# Altium PCB BBB_Board.PcbDoc (part 3 of 3)
Units mil, origin at the board's own origin, x right, y up, seen from the top; angles counter-clockwise.
Board outline 11000 x 5000 mil, 2 copper layers (Top Layer, Bottom Layer); 90 components, 379 nets, 1020 pads, 470 vias.
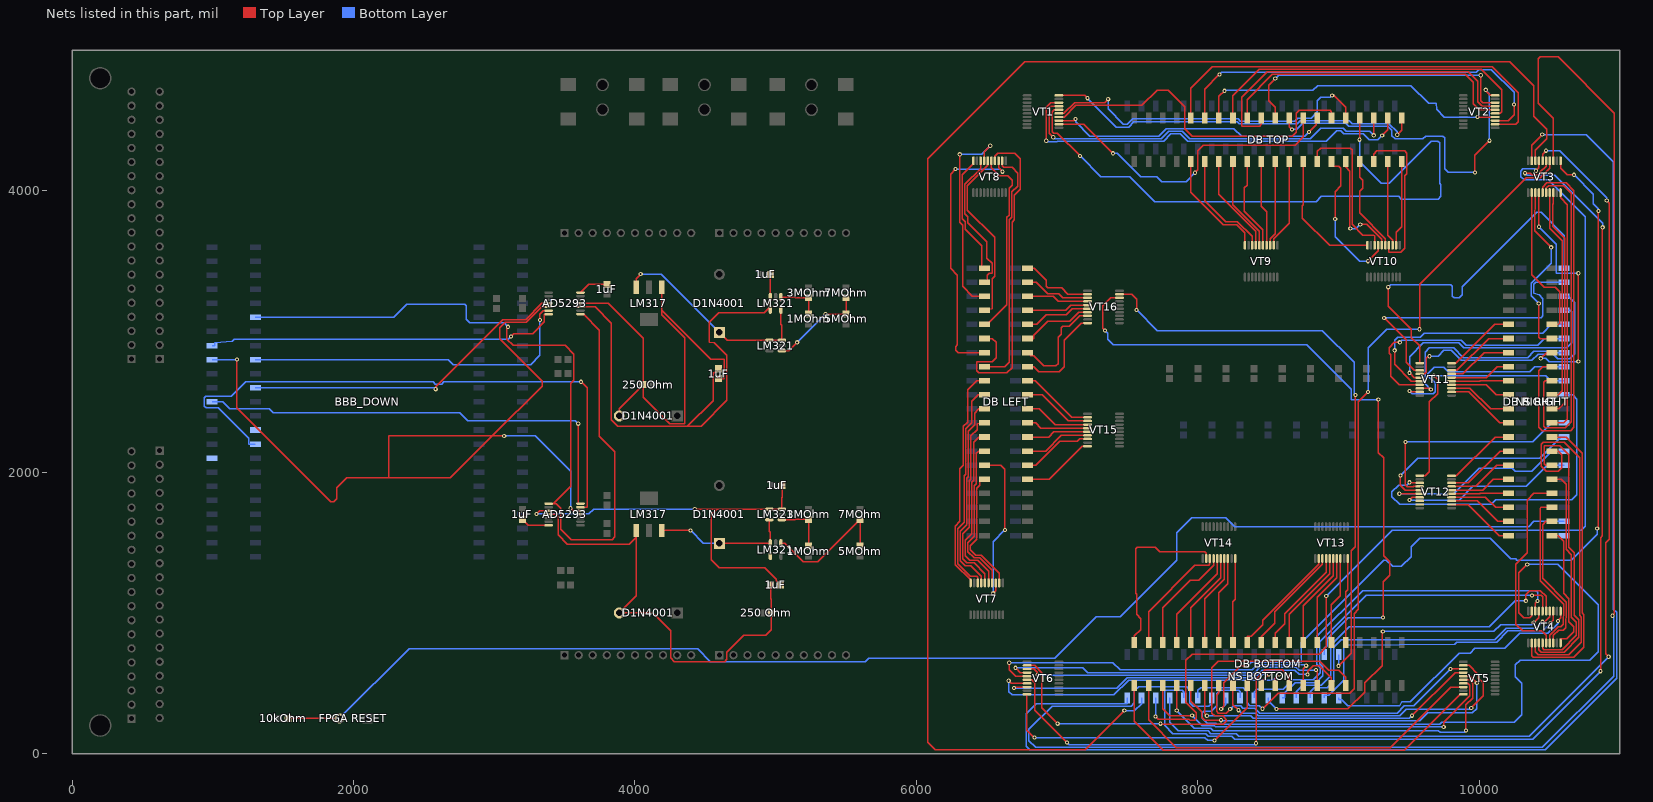
[diagram p3: the nets of this part, all layers, seen from the top]

## Via types
v1: diameter 30, hole 15, Top Layer to Bottom Layer, 470 vias

## Nets (pads, with @x,y where several pads share a name; then routed paths per layer and width w, separated by ;. In a path a pad name is that pad's centre, name@x,y a point inside that pad or via, vN(x,y) a via of type N, cw(c..) or ccw(c..) an arc to the next point about the centre after c; other vN are vias at no path point) (continued)
IVL_B94: "NS BOTTOM.15" VT16.8 | length 4720.5
  Top Layer w10: v1(7340,3006) 7323,3023 7323,3181.98 7380,3238.98 VT16.8@7443.19,3238.98 ; v1(9283,2516) 9283,2139.47 9321,2101.47 9321,1406.71 9363,1364.71 9363,1269 9317,1223 v1(9317,967)
  Bottom Layer w10: v1(7340,3006) 7360,2986 7360,2946 7400.42,2905.58 8774.42,2905.58 9090,2590 9090,2518 9092,2516 v1(9283,2516) ; 8900,703.54 8900,749 8919,768 8919,816 9070,967 v1(9317,967)
IVL_B95: "NS BOTTOM.16" VT16.9 | length 4201.9
  Top Layer w10: VT16.9@7443.19,3264.57 7530.43,3264.57 7565,3230 v1(7565,3153) ; v1(9000,624) 9091,715 9091,1442 9120,1471 v1(9120,2548)
  Bottom Layer w10: v1(7565,3153) 7712,3006 8883.73,3006 9110,2779.73 9110,2558 v1(9120,2548) ; v1(9000,624) 9000,703.54
IVL_B96: "NS BOTTOM.25" VT4.1 | length 1929.9
  Top Layer w10: v1(10560,942) 10560,947.34 10577.66,965 VT4.1@10577.66,1013.19
  Bottom Layer w10: 9000,396.46 9000,384 9023.4,384 9065.31,342.08 9434.69,342.08 9450,368 9510,368 9856.22,714.22 9934.72,714.22 9969.5,749 10180.17,749 10286.17,855 10488.43,855 10560,926.57 v1(10560,942)
IVL_B97: "NS BOTTOM.26" VT4.3 | length 2073.2
  Top Layer w10: v1(10506.48,928) 10526.48,948 VT4.3@10526.48,1013.19
  Bottom Layer w10: 8900,396.46 8900,416 8930.17,416 9036,521.83 9036,768.69 9824.21,776 9841.21,793 10122.77,793 10202.77,873 10451.48,873 v1(10506.48,928)
IVL_B98: "NS BOTTOM.27" VT4.4 | length 2149.5
  Top Layer w10: v1(10450.49,936.55) 10465.55,936.55 10500.89,971.89 VT4.4@10500.89,1013.19
  Bottom Layer w10: 8800,396.46 8800,441 8827,468 8919.17,468 8965,513.83 8965,757.69 9018.31,811 10111.19,811 10191.19,891 10404.94,891 v1(10450.49,936.55)
IVL_B99: "NS BOTTOM.28" VT4.5 | length 2389.4
  Top Layer w10: v1(10331,1086) 10331,1129 10360,1158 10434,1158 10475.3,1116.7 VT4.5@10475.3,1013.19
  Bottom Layer w10: 8700,396.46 8700,440 8746,486 8879,486 8946,553 8946,770.39 9075.61,900 10070,900 10256,1086 v1(10331,1086)
IVL_B100: "NS BOTTOM.29" VT4.6 | length 2451.1
  Top Layer w10: v1(10375.7,1124) 10439.7,1124 10449.7,1114 VT4.6@10449.7,1013.19
  Bottom Layer w10: 8600,396.46 8619,396.46 8619,432 8692,505 8840,505 8889,554 8889,616.28 8865,640.28 8865,793.5 9195.5,1124 v1(10375.7,1124)
IVL_B101: "NS BOTTOM.30" VT4.7 | length 2463
  Top Layer w10: v1(8559,318) 9066.42,318 9186,437.58 9186,502 9310,626 9310,868 v1(9315,868) ; v1(10388,931) 10424.11,967.11 VT4.7@10424.11,1013.19
  Bottom Layer w10: 8500,396.46 8500,377 v1(8559,318) ; v1(9315,868) 10103.3,868 10151.3,916 10374,916 10388,930 v1(10388,931)
IVL_B102: "NS BOTTOM.31" VT4.8 | length 2685.7
  Top Layer w10: VT4.8@10398.52,1013.19 10398.52,1068.52 v1(10414,1084)
  Bottom Layer w10: 8400,396.46 8400,438 8420,458 8608,458 8674,524 8819.83,524 8869.83,574 8869.83,610 8846,633.83 8846,834 9171,1159 10402.62,1159 10414,1147.62 v1(10414,1084)
IVL_B103: "NS BOTTOM.32" VT4.9 | length 5261.4
  Top Layer w10: v1(10341,1345) 10280,1284 10280,1001 10315,966 10360,966 10372.93,978.93 VT4.9@10372.93,1013.19
  Bottom Layer w10: 8300,396.46 8300,441 8290,451 8160,451 8136,427 8136,339 8097,300 8043,300 8032,289 8032,251 8066,217 8126,217 8135,208 9719,208 9733,222 10249,222 10303,276 10303,499 10257,545 10257,630.88 10291.12,665 10784,665 10844,725 10844,1058 10557,1345 v1(10341,1345)
IVL_B104: "NS BOTTOM.33" VT3.1 | length 6463
  Top Layer w10: v1(8166,318) 8185,337 8185,504 8306,625 v1(8356,625) ; VT3.1@10577.66,4213.19 10577.66,4160 10624.66,4113 v1(10674,4113) ; v1(10838,1599) 10847,1608 v1(10847,3857)
  Bottom Layer w10: v1(8166,318) 8200,352 8200,396.46 ; v1(8356,625) 8380.17,649.17 8735,649.17 8735,787 9323,1375 9340,1375 9385,1330 9447,1330 9516,1399 9516,1469 9578,1531 10077,1531 10224,1384 10258,1384 10267,1375 10654,1375 10838,1559 v1(10838,1599) ; v1(10674,4113) 10811,3976 10811,3909 10847,3873 v1(10847,3857)
IVL_B105: "NS BOTTOM.34" VT3.3 | length 11595.3
  Top Layer w10: VT3.3@10526.48,4213.19 10526.48,4516.52 10420,4623 10420,4939 10433,4952 10561,4952 10961,4552 10961,994 v1(10947,980)
  Bottom Layer w10: 8100,396.46 8100,356 8079,335 7969,335 7944,360 7944,452 7920,476 7580,476 7550,446 7550,360 7526,336 6964,336 6800,172 6800,91 6847,44 10448,44 10955,551 10955,972 v1(10947,980)
IVL_B106: "NS BOTTOM.35" VT3.4 | length 5864.2
  Top Layer w10: v1(8460,319) 8570.58,429.58 9079.58,429.58 9110,460 9110,995 9140,1025 9140,2500 v1(9210,2570) ; v1(9576,3016) 9576,3334.23 10335.47,4093.69 10434.81,4093.69 10500.89,4159.77 VT3.4@10500.89,4213.19
  Bottom Layer w10: 8000,396.46 8000,450 8020,470 8322,470 8352,440 8352,360 8369.92,342.08 8436.92,342.08 v1(8460,319) ; v1(9210,2570) 9210,2884 9342,3016 v1(9576,3016)
IVL_B107: "NS BOTTOM.36" VT3.5 | length 7882.8
  Top Layer w10: v1(10326,4125) 10361,4125 10374,4112 10420,4112 10434.11,4126.11 10434.11,4133.78 10475.3,4174.96 VT3.5@10475.3,4213.19 ; v1(10862,586) 10862,1534 10875,1547 10875,3738 v1(10877,3740)
  Bottom Layer w10: 7900,396.46 7900,441 7890,451 7765,451 7765,200 7822,143 8056,143 8074,125 8242,125 8263,104 10380,104 v1(10862,586) ; v1(10326,4125) 10341,4110 10537,4110 10877,3770 v1(10877,3740)
IVL_B108: "NS BOTTOM.37" VT3.6 | length 7510
  Top Layer w10: VT3.6@10449.7,4213.19 10449.7,4260.7 v1(10474,4285) ; v1(10906,3931) 10925,3912 10925,3692 10923,3690 10923,1523 10899,1499 10899,709.75 v1(10919.88,688.88)
  Bottom Layer w10: 7800,396.46 7800,223 7862,161 8074,161 8092,143 8272,143 8291,124 10355,124 v1(10919.88,688.88) ; v1(10474,4285) 10572,4285 10906,3951 v1(10906,3931)
IVL_B109: "NS BOTTOM.38" VT3.7 | length 7340.5
  Top Layer w10: v1(7700,264) 7720,244 7938,244 7943,239 7977,239 7990,252 7990,289 7914,365 7914,662 7960,708 8862,708 8913,759 v1(8913,1120) ; v1(10404,4142) 10424.11,4162.11 VT3.7@10424.11,4213.19
  Bottom Layer w10: v1(7700,264) 7700,396.46 ; v1(8913,1120) 9382,1589 10726,1589 10753,1616 10753,3816 10492,4077 10319,4077 10295,4101 10295,4140 10310,4155 10391,4155 v1(10404,4142)
IVL_B110: "NS BOTTOM.39" VT3.8 | length 11130.7
  Top Layer w10: v1(7478,306) 7200,28 6135,28 6082,81 6082,4229 6771,4918 10216,4918 10388,4746 10388,4528 10479,4437 10479,4370 10398.52,4289.52 VT3.8@10398.52,4213.19
  Bottom Layer w10: v1(7478,306) 7550,306 7600,356 7600,396.46
IVL_B111: "NS BOTTOM.40" VT3.9 | length 9924.6
  Top Layer w10: VT3.9@10372.93,4213.19 10372.93,4323.93 v1(10448,4399)
  Bottom Layer w10: 7500,396.46 7500,355 6851,355 6781,285 6781,50.97 6805.97,26 10469,26 10977,534 10977,1004.43 10954,1027.43 10954,4206 10761,4399 v1(10448,4399)
IVL_B112: "NS RIGHT.1" VT11.1 | length 2553.5
  Top Layer w10: v1(9353,3315) 9353,3180 9518,3015 9518,2955.94 9577,2896.94 9577,2775.16 VT11.1@9576.81,2775.16
  Bottom Layer w10: v1(9353,3315) 9354,3315 9370,3331 9798,3331 9809,3320 9809,3252 9821,3240 9859,3240 9879,3260 9879,3317 10408.93,3846.93 10439.07,3846.93 10604,3682 10604,3450 10603.54,3450
IVL_B113: "NS RIGHT.2" VT11.3 | length 2123
  Top Layer w10: v1(9324.5,3096.5) 9481,2940 9481,2782.54 9539.57,2723.98 VT11.3@9576.81,2723.98
  Bottom Layer w10: v1(9324.5,3096.5) 10439.5,3096.5 10453,3110 10453,3234 10427,3260 10387,3270 10387,3335.5 10401.5,3350 10603.54,3350
IVL_B114: "NS RIGHT.3" VT11.4 | length 1759.4
  Top Layer w10: VT11.4@9576.81,2698.39 9612,2698.39 9623.31,2709.7 9623.31,2810 9637.31,2824 v1(9646,2824)
  Bottom Layer w10: v1(9646,2824) 9708,2824 9749,2865 9800,2865 9871,2794 10374.31,2794 10420,2839.69 10526.36,2839.69 10559.04,2807 10643,2807 10677,2841 10677,3204 10631,3250 10603.54,3250
IVL_B115: "NS RIGHT.4" VT11.5 | length 1702.7
  Top Layer w10: v1(9505,2706) 9538.2,2672.8 VT11.5@9576.81,2672.8
  Bottom Layer w10: v1(9505,2706) 9505,2821.45 9602.55,2919 9854.45,2919 9888.76,2884.69 10622.69,2884.69 10659,2921 10659,3139 10648,3150 10603.54,3150
IVL_B116: "NS RIGHT.5" VT11.6 | length 1649.4
  Top Layer w10: v1(9398.82,2866.18) 9398.82,2766.18 9517.8,2647.2 VT11.6@9576.81,2647.2
  Bottom Layer w10: v1(9398.82,2866.18) 9398.82,2936.63 9420,2957.82 9579.47,2957.82 9610.65,2989 10450.28,2989 10511.28,3050 10603.54,3050
IVL_B117: "NS RIGHT.6" VT11.7 | length 1739
  Top Layer w10: v1(9435.63,2923) 9397,2923 9360,2886 9360,2846 9371,2835 9371,2681 9430.39,2621.61 VT11.7@9576.81,2621.61
  Bottom Layer w10: v1(9435.63,2923) 9450.63,2938 9871.45,2938 9906.45,2903 10415,2903 10462,2950 10603.54,2950
IVL_B118: "NS RIGHT.7" VT11.8 | length 1417
  Top Layer w10: VT11.8@9576.81,2596.02 9646.98,2596.02 v1(9656,2587)
  Bottom Layer w10: v1(9656,2587) 9615,2628 9615,2853.02 9644.98,2883 9818,2883 9887,2814 10344.57,2814 10388.57,2858 10536.36,2858 10544.36,2850 10603.54,2850
IVL_B119: "NS RIGHT.8" VT11.9 | length 1438.9
  Top Layer w10: v1(9504,2577) 9510.57,2570.43 VT11.9@9576.81,2570.43
  Bottom Layer w10: v1(9504,2577) 9525,2556 9672,2556 9686,2570 9686,2634 9634,2686 9634,2699 9680,2745 9748,2745 9779,2714 10360,2714 10396,2750 10603.54,2750
IVL_B120: "NS RIGHT.9" VT12.1 | length 1743.1
  Top Layer w10: VT12.1@9576.81,1975.16 9618,1975.16 9646.17,2003.32 9646.17,2499.17 9704,2557 9704,2659 v1(9676,2687)
  Bottom Layer w10: v1(9676,2687) 10474,2687 10511,2650 10603.54,2650
IVL_B121: "NS RIGHT.10" VT12.3 | length 2410.1
  Top Layer w10: v1(9505,1928) 9509.02,1923.98 VT12.3@9576.81,1923.98
  Bottom Layer w10: v1(9505,1928) 9485.5,1908.5 9427.5,1908.5 9380,1861 9380,1825 9434,1771 10085,1771 10116.69,1802.69 10656.69,1802.69 10694,1840 10694,2520 10664,2550 10603.54,2550
IVL_B122: "NS RIGHT.12" VT12.4 | length 1598.1
  Top Layer w10: v1(9475,2215) 9475,1910 9489,1896 9532.61,1896 9535,1898.39 VT12.4@9576.81,1898.39
  Bottom Layer w10: v1(9475,2215) 10380,2215 10515,2350 10603.54,2350
IVL_B123: "NS RIGHT.13" VT12.5 | length 1497.4
  Top Layer w10: v1(9440,1976) 9440,1906.36 9473.56,1872.8 VT12.5@9576.81,1872.8
  Bottom Layer w10: v1(9440,1976) 9564,2100 10430,2100 10580,2250 10603.54,2250
IVL_B124: "NS RIGHT.14" VT12.6 | length 1459.1
  Top Layer w10: v1(9432,1847) 9432.2,1847.2 VT12.6@9576.81,1847.2
  Bottom Layer w10: v1(9432,1847) 9818,1847 9999,2028 10234,2028 10254.65,2007.35 10374.35,2007.35 10517,2150 10603.54,2150
IVL_B125: "NS RIGHT.15" VT12.7 | length 1283.2
  Top Layer w10: v1(9504,1802) 9523.61,1821.61 VT12.7@9576.81,1821.61
  Bottom Layer w10: v1(9504,1802) 9857,1802 9955,1900 10334,1900 10484,2050 10603.54,2050
IVL_B126: VT12.8
IVL_B127: VT12.9
Net1_U_Power_Control1_2: 1uF.2@4965,1200 "250 Ohm.1"@4968,1000 AD5293.4@3386.81,1700 D1N4001.1@3889.09,1000 LM317.1@4009.45,1585.83 | length 3219.4
  Top Layer w10: AD5293.4@3386.81,1700 3437,1700 3455,1682 3455,1554 3520,1489 3960,1489 4009.45,1538.45 ; LM317.1@4009.45,1585.83 4009.45,1538.45 ; 1uF.2@4965,1200 4965,1101 4968,1098 4968,1000 4968,880 4928,840 4775,840 4654,719 4654,669 4639,654 4281,654 4254,681 4254,872 4126,1000 D1N4001.1@3889.09,1000 4009.45,1120.35 4009.45,1538.45
Net1_U_Power_Control2_2: 1uF.2@4595,2665 "250 Ohm.1"@4059,2622 AD5293.4@3613.19,3200 D1N4001.1@3889.09,2400 LM317.1@4190.55,3314.17 | length 3435.1
  Top Layer w10: AD5293.4@3613.19,3200 3812,3200 4059,2953 4059,2622 ; D1N4001.1@3889.09,2400 3889.09,2452.09 4059,2622 ; LM317.1@4190.55,3314.17 4190.55,3150.56 ; 1uF.2@4595,2665 4635,2665 4635,2799 4632.88,2801.12 4540,2801.12 4190.55,3150.56 ; 4059,2622 4059,2533.16 4246.53,2345.63 4355.28,2345.63 4355.28,2954.27 4190.55,3119 4190.55,3150.56
Net5_U_Power_Control1_2: 1uF.2@3200,1665 AD5293.7@3386.81,1623.23 | length 204.1
  Top Layer w10: 1uF.2@3200,1665 3241.77,1623.23 AD5293.7@3386.81,1623.23
Net5_U_Power_Control2_2: 1uF.2@3800,3335 AD5293.7@3613.19,3276.77 | length 210.9
  Top Layer w10: AD5293.7@3613.19,3276.77 3671.42,3335 1uF.2@3800,3335
NetLM1_U_Power_Control1_1: 1MOhm.2@5235,1475 3MOhm.1@5235,1665 LM321.1@5044.29,1662.6 | length 381.7
  Top Layer w10: LM321.1@5044.29,1662.6 5138,1662.6 5140.4,1665 3MOhm.1@5235,1665 1MOhm.2@5235,1475
NetLM1_U_Power_Control2_1: 1MOhm.2@5235,3124 3MOhm.1@5235,3240 LM321.1@5037.4,3244.29 | length 315.4
  Top Layer w10: LM321.1@5037.4,3244.29 5134,3244.29 5138.29,3240 3MOhm.1@5235,3240 1MOhm.2@5235,3124
NetLM2_U_Power_Control1_1: 5MOhm.1@5600,1475 7MOhm.2@5600,1665 LM321.1@5037.4,1494.29 | length 932.2
  Top Layer w10: LM321.1@5037.4,1494.29 5037.4,1495 5065,1495 5196,1364 5299,1364 7MOhm.2@5600,1665 5MOhm.1@5600,1475
NetLM2_U_Power_Control2_1: 5MOhm.1@5500,3124 7MOhm.2@5500,3240 LM321.1@5044.29,2862.6 | length 680
  Top Layer w10: LM321.1@5044.29,2862.6 5092.6,2862.6 v1(5153,2923) ; v1(5354,3124) 5MOhm.1@5500,3124 7MOhm.2@5500,3240
  Bottom Layer w10: v1(5153,2923) v1(5354,3124)
OTHER_W20: "NS RIGHT.20"
OTHER_W21: 10kOhm.2 "FPGA RESET.2" "NS RIGHT.19" | length 9888.8
  Top Layer w10: 10kOhm.2@1535,250 1900,250
  Bottom Layer w10: 1900,250 2395,745 4445,745 4536,654 5636,654 5660,678 6982,678 7278,974 7449,974 7849,1374 7849,1568 7956,1675 8199,1675 8261,1613 10352,1613 10389,1650 10603.54,1650
OUT1_U_Power_Control1: 1uF.1@5035,1200 1uF.1@5046,1906 AD5293.3@3386.81,1725.59 LM321.3@5044.29,1737.4 LM321.4@4955.71,1737.4 | length 2969.9
  Top Layer w10: v1(3300,1703) 3322.59,1725.59 AD5293.3@3386.81,1725.59 ; v1(4425.4,1737.4) 4582.4,1737.4 ; 1uF.1@5035,1200 5005,1230 5005,1240 4923,1322 4600,1322 4544,1378 4544,1699 4582.4,1737.4 ; 1uF.1@5046,1906 5046,1821.71 5044.29,1820 LM321.3@5044.29,1737.4 5000,1737.4 LM321.4@4955.71,1737.4 4582.4,1737.4
  Bottom Layer w10: v1(3300,1703) 3672.83,1703 3707.24,1737.4 v1(4425.4,1737.4)
OUT1_U_Power_Control2: 1uF.1@4595,2735 1uF.1@4963,3406 AD5293.3@3613.19,3174.41 LM321.3@4962.6,3244.29 LM321.4@4962.6,3155.71 | length 3733.1
  Top Layer w10: AD5293.3@3613.19,3174.41 3716.59,3174.41 3833,3058 3833,2372 3877.37,2327.63 4373.28,2327.63 ; 1uF.1@4595,2735 4565,2705 4555,2705 4555,2509.35 4373.28,2327.63 ; LM321.4@4962.6,3155.71 LM321.4@4962.6,3176.79 ; 1uF.1@4963,3406 4963,3324.4 4962.6,3324 LM321.3@4962.6,3244.29 LM321.4@4962.6,3176.79 ; 4373.28,2327.63 4469.63,2327.63 4654,2512 4654,2830 4563,2921 4527,2922.35 4527,3065.84 4595.36,3134.2 4920,3134.2 LM321.4@4962.6,3176.79
OUT2_U_Power_Control1: D1N4001.2@4600,1494.09 LM317.3@4190.55,1585.83 LM321.3@4962.6,1494.29 LM321.4@4962.6,1405.71 LM321.5@4955.71,1662.6 | length 1070.1
  Top Layer w10: LM317.3@4190.55,1585.83 4190.55,1586 v1(4395,1586) ; D1N4001.2@4600,1494.09 4781,1494.09 4781.2,1494.29 LM321.3@4962.6,1494.29 ; LM321.5@4955.71,1662.6 4955.71,1581.89 4962.6,1575 LM321.3@4962.6,1494.29 ; LM321.4@4962.6,1405.71 LM321.3@4962.6,1494.29
  Bottom Layer w10: v1(4395,1586) 4486.91,1494.09 D1N4001.2@4600,1494.09
OUT2_U_Power_Control2: D1N4001.2@4600,2994.09 LM317.3@4009.45,3314.17 LM321.3@5044.29,2937.4 LM321.4@4955.71,2937.4 LM321.5@5037.4,3155.71 | length 1526.3
  Top Layer w10: LM317.3@4009.45,3314.17 4009.45,3376.45 v1(4041,3408) ; D1N4001.2@4600,2994.09 4656.69,2937.4 LM321.4@4955.71,2937.4 LM321.3@5044.29,2937.4 5044.29,3043 5037.4,3049.89 LM321.5@5037.4,3155.71
  Bottom Layer w10: v1(4041,3408) 4186.09,3408 D1N4001.2@4600,2994.09
OVCC_B0: "DB TOP.1" VT1.20 | length 2710.1
  Top Layer w10: VT1.20@7013.19,4677.66 7196.34,4677.66 v1(7216,4658) ; v1(9417,4398) 9450,4431 9450,4516.04
  Bottom Layer w10: v1(7216,4658) 7421,4453 7510.19,4453 7546.17,4488.98 8281.51,4488.98 8293.31,4477.17 8706.69,4477.17 8727.51,4498 9077.5,4498 9098.5,4477 9358,4477 9417,4418 v1(9417,4398)
OVCC_B1: "DB TOP.2" VT1.18 | length 2986.3
  Top Layer w10: v1(6923,4355) 6923,4594 6955.48,4626.48 VT1.18@7013.19,4626.48 ; v1(9310,4393) 9350,4433 9350,4516.04
  Bottom Layer w10: v1(6923,4355) 6928.29,4349.71 7000.03,4349.71 7002.33,4352 7756.26,4352 7809.26,4405 7875,4405 7929,4351 8912,4351 8987,4426 9014.9,4426 9036.9,4404 9176.97,4404 9217.97,4363 9280,4363 v1(9310,4393)
OVCC_B2: "DB TOP.3" VT1.17 | length 2792.8
  Top Layer w10: v1(6973,4380) 6945,4408 6945,4588.3 6957.59,4600.89 VT1.17@7013.19,4600.89 ; v1(9250,4393.97) 9250,4516.04
  Bottom Layer w10: v1(6973,4380) 6982.33,4370.67 7739.16,4370.67 7792.31,4423.83 7889,4423.83 7943.83,4369 8799,4369 8874,4444 9032.9,4444 9054.9,4422 9221.97,4422 v1(9250,4393.97)
OVCC_B3: "DB TOP.4" VT1.16 | length 4650.1
  Top Layer w10: VT1.16@7013.19,4575.3 6980,4575.3 6966,4561.3 6966,4420 6976,4410 7000,4410 v1(7163,4247) ; v1(9150,4363) 9150,4516.04
  Bottom Layer w10: v1(7163,4247) 7311,4099 7518.13,4099 7694.13,3923 8842,3923 8879,3960 9426.5,3960 9447.5,3939 9707,3939 9728,3960 9728,4043 9718,4053 9718,4340 9705,4353 9660,4353 9360,4053 9303,4053 9150,4206 v1(9150,4363)
OVCC_B4: "DB TOP.5" VT1.15 | length 2450.3
  Top Layer w10: VT1.15@7013.19,4549.7 7047.7,4549.7 7125,4627 7339,4627 v1(7363,4651) ; v1(8955,4677) 8967,4677 9050,4594 9050,4516.04
  Bottom Layer w10: v1(7363,4651) 7363,4581 7471,4473 7499,4473 7537,4511 8287.17,4511 8303,4495.17 8688.69,4495.17 8710.51,4517 8807,4517 8850,4560 8850,4640 8873.01,4663.01 8941.01,4663.01 v1(8955,4677)
OVCC_B5: "DB TOP.6" VT1.14 | length 2445.6
  Top Layer w10: VT1.14@7013.19,4524.11 7050,4524.11 7131.89,4606 7603.08,4606 7710.08,4713 7789.6,4713 7907.04,4595.56 7907.04,4439.96 7960,4387 8671,4387 8701,4417 8701,4552 8720,4571 8940,4571 8950,4561 8950,4516.04
OVCC_B6: "DB TOP.7" VT1.13 | length 2022.7
  Top Layer w10: VT1.13@7013.19,4498.52 7118.89,4498.52 v1(7131.18,4510.82) ; v1(8790,4417) 8843,4470 8850,4516.04
  Bottom Layer w10: v1(7131.18,4510.82) 7131.18,4490.85 7233.03,4389 7721.49,4389 7774.49,4442 8257.14,4442 8312.14,4387 8760,4387 v1(8790,4417)
OVCC_B7: "DB TOP.8" VT1.12 | length 2250.2
  Top Layer w10: VT1.12@7013.19,4472.93 7190.07,4472.93 v1(7397,4266) ; v1(7980,4128) 8000,4148 8000,4283 8040,4323 8691,4323 8750,4382 8750,4516.04
  Bottom Layer w10: v1(7397,4266) 7426.29,4266 7594.29,4098 7710,4098 7743,4065 7917,4065 v1(7980,4128)
OVCC_B8: "DB TOP.9" VT2.20 | length 2445.5
  Top Layer w10: 8650,4516.04 8650,4456 v1(8670,4436) ; v1(9969,4130) 9969,4253 v1(10072,4356) ; v1(10046,4717) 10046,4710.66 10079,4677.66 VT2.20@10113.19,4677.66
  Bottom Layer w10: v1(8670,4436) 8701.51,4436 8745.51,4480 9051.98,4480 9072.98,4459 9350,4459 9380,4429 9380,4392 9404,4368 9599,4368 9620,4389 9740,4389 9754,4375 9754,4156 9780,4130 v1(9969,4130) ; v1(10046,4717) 10072,4691 v1(10072,4356)
OVCC_B9: "DB TOP.10" VT2.18 | length 2079
  Top Layer w10: 8550,4516.04 8550,4593 8503,4640 8503,4750 v1(8550,4797) ; v1(10011,4821) 10011,4641 10025.52,4626.48 VT2.18@10113.19,4626.48
  Bottom Layer w10: v1(8550,4797) 8574,4821 v1(10011,4821)
OVCC_B10: "DB TOP.11" VT2.17 | length 2449.4
  Top Layer w10: 8450,4516.04 8450,4471 8439,4460 8316,4460 8314,4462 8314,4665 8494,4845 9921.18,4845 9989,4777.18 9989,4631.89 10020,4600.89 VT2.17@10113.19,4600.89
OVCC_B11: "DB TOP.12" VT2.16 | length 2163
  Top Layer w10: 8350,4516.04 8350,4647 8530,4827 9901.98,4827 9958.7,4770.28 9958.7,4616.59 10000,4575.3 VT2.16@10113.19,4575.3
OVCC_B12: "DB TOP.13" VT2.15 | length 2417.9
  Top Layer w10: 8250,4516.04 8250,4676.67 8436.33,4863 10015,4863 10161,4717 10161,4560.7 10150,4549.7 VT2.15@10113.19,4549.7
OVCC_B13: "DB TOP.14" VT2.14 | length 2264.1
  Top Layer w10: 8150,4516.04 8150,4670 v1(8190,4710) ; v1(9987.74,4524.11) VT2.14@10113.19,4524.11
  Bottom Layer w10: v1(8190,4710) 8193,4713 8818.6,4713 8852.6,4747 9514.99,4747 9640,4621.99 9693.92,4621.99 9696.96,4578.14 9750.98,4524.11 v1(9987.74,4524.11)
OVCC_B14: "DB TOP.15" VT2.13 | length 2838.8
  Top Layer w10: 8050,4516.04 8050,4723 v1(8154,4827) ; VT2.13@10113.19,4498.52 10205.52,4498.52 10247,4540 v1(10247,4613.89)
  Bottom Layer w10: v1(8154,4827) 8170,4843 9977.45,4843 9995.89,4861.44 10084.96,4861.44 10247,4699.4 v1(10247,4613.89)
OVCC_B15: "DB TOP.16" VT2.12 | length 3057.5
  Top Layer w10: 7950,4516.04 7950,4728 8104,4882 10091,4882 10278,4695 10278,4491 10259.93,4472.93 VT2.12@10113.19,4472.93
OVCC_B16: "DB TOP.25" VT9.20 | length 811.6
  Top Layer w10: 7950,4208.96 7950,3988.44 8181.36,3757.08 8277.76,3757.08 8334.84,3700 VT9.20@8334.84,3613.19
OVCC_B17: "DB TOP.26" VT9.18 | length 782.1
  Top Layer w10: 8050,4208.96 8050,3930.51 8199.36,3781.15 8279.88,3781.15 8386.02,3675 VT9.18@8386.02,3613.19
OVCC_B18: "DB TOP.27" VT9.17 | length 704.1
  Top Layer w10: 8150,4208.96 8150,3974.72 8411.61,3713.11 VT9.17@8411.61,3613.19
OVCC_B19: "DB TOP.28" VT9.16 | length 673.3
  Top Layer w10: 8250,4208.96 8250,3901 8437.2,3713.8 VT9.16@8437.2,3613.19
OVCC_B20: "DB TOP.29" VT9.15 | length 658.2
  Top Layer w10: 8350,4208.96 8350,4039.71 8331,4020.71 8331,3853.8 8462.8,3722 VT9.15@8462.8,3613.19
OVCC_B21: "DB TOP.30" VT9.14 | length 611.7
  Top Layer w10: 8450,4208.96 8450,3888.94 8488.39,3850.55 VT9.14@8488.39,3613.19
OVCC_B22: "DB TOP.31" VT9.13 | length 610.7
  Top Layer w10: VT9.13@8513.98,3613.19 8513.98,3660 8550,3696.02 8550,4208.96
OVCC_B23: "DB TOP.32" VT9.12 | length 641.5
  Top Layer w10: VT9.12@8539.57,3613.19 8539.57,3660 8650,3770.43 8650,4208.96
OVCC_B24: "DB TOP.33" VT10.20 | length 948.7
  Top Layer w10: 8750,4208.96 8750,3901 8743,3894 8743,3806 8937,3612 9203.84,3612 9204.84,3613 VT10.20@9204.84,3613.19
OVCC_B25: "DB TOP.34" VT10.18 | length 1120.6
  Top Layer w10: 8850,4208.96 8850,4280 8872,4302 9085,4302 9097,4290 9097,3760.8 9173.8,3684 9252.02,3684 9256.02,3680 VT10.18@9256.02,3613.19
OVCC_B26: "DB TOP.35" VT10.17 | length 1058.1
  Top Layer w10: 8950,4208.96 8950,4173 9002,4173 9016,4159 9016,4034 8976,3994 v1(8976,3799.76) ; v1(9208.5,3499.5) 9281.61,3572.61 VT10.17@9281.61,3613.19
  Bottom Layer w10: v1(8976,3799.76) 8976,3674 9150.5,3499.5 v1(9208.5,3499.5)
OVCC_B27: "DB TOP.36" VT10.16 | length 813.4
  Top Layer w10: 9050,4208.96 9050,4169 9079,4140 9079,3736 v1(9084,3731) ; v1(9154,3761) 9201.2,3761 9307.2,3655 VT10.16@9307.2,3613.19
  Bottom Layer w10: v1(9084,3731) 9124,3731 v1(9154,3761)
OVCC_B28: "DB TOP.37" VT10.15 | length 688.9
  Top Layer w10: 9150,4208.96 9150,4097 9171,4076 9171,4018 9150,3997 9150,3842.8 9332.8,3660 VT10.15@9332.8,3613.19
OVCC_B29: "DB TOP.38" VT10.14 | length 1155.9
  Top Layer w10: 9250,4208.96 9250,4260 9273,4283 9470,4283 9486,4267 9486,4121 9470,4105 9470,3590.86 9443.64,3564.5 9360.5,3564.5 9358.39,3566.61 VT10.14@9358.39,3613.19
OVCC_B30: "DB TOP.39" VT10.13 | length 609.8
  Top Layer w10: 9350,4208.96 9350,3682.98 9383.98,3649 VT10.13@9383.98,3613.19
OVCC_B31: "DB TOP.40" VT10.12 | length 612.5
  Top Layer w10: VT10.12@9409.57,3613.19 9409.57,3704.57 9450,3745 9450,4208.96
OVCC_B32: "DB BOTTOM.1" VT5.20 | length 2840.3
  Top Layer w10: 7550,483.96 7550,230 7755,25 9466.66,25 9864,422.34 VT5.20@9886.81,422.34
OVCC_B33: "DB BOTTOM.2" VT5.18 | length 2740.7
  Top Layer w10: 7650,483.96 7650,240 7847,43 9367,43 9797.52,473.52 VT5.18@9886.81,473.52
OVCC_B34: "DB BOTTOM.3" VT5.17 | length 2640.5
  Top Layer w10: 7750,483.96 7750,320 7799,271 v1(7960,271) ; v1(9747.25,190) 9747.25,224.77 9934,411.52 9934,485.11 9920,499.11 VT5.17@9886.81,499.11
  Bottom Layer w10: v1(7960,271) 8032,199 8118,199 8127,190 v1(9747.25,190)
OVCC_B35: "DB BOTTOM.4" VT5.16 | length 2734.3
  Top Layer w10: v1(7850,306) 7850,483.96 ; VT5.16@9886.81,524.7 9927.3,524.7 9953,499 9953,395 9905,347 v1(9905,164)
  Bottom Layer w10: v1(7850,306) 7976,180 8091,180 8109,162 9710.25,162 9721.25,151 9892,151 v1(9905,164)
OVCC_B36: "DB BOTTOM.5" VT5.15 | length 2557.4
  Top Layer w10: 7950,483.96 7950,373.07 8026.79,296.28 8026.79,260 8048.79,238 v1(8165,238) ; VT5.15@9886.81,550.3 9934.7,550.3 v1(9983,502)
  Bottom Layer w10: v1(8165,238) 8170,233 9576.76,233 9632.76,289 9952,289 9983,320 v1(9983,502)
OVCC_B37: "DB BOTTOM.6" VT5.14 | length 2185.5
  Top Layer w10: 8050,483.96 8050,283 v1(8064,269) ; v1(9522,270) 9827.89,575.89 VT5.14@9886.81,575.89
  Bottom Layer w10: v1(8064,269) 8375.08,269 8393,251.08 9503.08,251.08 v1(9522,270)
OVCC_B38: "DB BOTTOM.7" VT5.13 | length 2122
  Top Layer w10: 8150,483.96 8150,431.08 8134,415.08 8134,300.22 8146.22,288 8201,288 v1(8230,317) ; v1(9796.42,601.48) VT5.13@9886.81,601.48
  Bottom Layer w10: v1(8230,317) 8254,341 8304.08,341 8321.08,324 8405,324 8441,288 9416.6,288 9468.13,339.52 9534.47,339.52 v1(9796.42,601.48)
OVCC_B39: "DB BOTTOM.8" VT5.12 | length 2304.4
  Top Layer w10: 8250,483.96 8250,349 v1(8290,309) ; VT5.12@9886.81,627.07 9928.5,627.07 9990.07,565.49 9990.07,540.72 10028,502.79 10028,410 v1(9943,325)
  Bottom Layer w10: v1(8290,309) 8311,288 8411.77,288 8430.68,269.08 9433.69,269.08 9481.6,317 9935,317 v1(9943,325)
OVCC_B40: "DB BOTTOM.9" VT6.20 | length 2105.3
  Top Layer w10: VT6.20@6786.81,422.34 6786,422.34 6786,167 v1(6839,114) ; v1(8119.46,94) 8350,324.54 8350,483.96
  Bottom Layer w10: v1(6839,114) 8049,114 8069,94 v1(8119.46,94)
OVCC_B41: "DB BOTTOM.10" VT6.18 | length 2047.9
  Top Layer w10: v1(6694.52,466) 6702.05,473.52 VT6.18@6786.81,473.52 ; 8450,483.96 8450,508 v1(8505,563)
  Bottom Layer w10: v1(6694.52,466) 7423.42,466 7497.59,540.17 8440.36,540.17 8463.19,563 v1(8505,563)
OVCC_B42: "DB BOTTOM.11" VT6.17 | length 2301.5
  Top Layer w10: v1(6656,518) 6674.89,499.11 VT6.17@6786.81,499.11 ; 8550,483.96 8550,535 v1(8579,564)
  Bottom Layer w10: v1(6656,518) 6656,441 6680,417 7404,417 7509,522 8537,522 v1(8579,564)
OVCC_B43: "DB BOTTOM.12" VT6.16 | length 2736.3
  Top Layer w10: VT6.16@6786.81,524.7 6820,524.7 6840,504.7 6840,310 v1(7070,80) ; v1(8414,74) 8414,529 8480,595 8600,595 8650,545 8650,483.96
  Bottom Layer w10: v1(7070,80) 7086,64 8404,64 v1(8414,74)
OVCC_B44: "DB BOTTOM.13" VT6.15 | length 2493.4
  Top Layer w10: v1(6660,646) 6660,596.28 6705.98,550.3 VT6.15@6786.81,550.3 ; 8750,483.96 8750,605 v1(8770,625)
  Bottom Layer w10: v1(6660,646) 7396.49,646 7447.49,595 8386.36,595 8422.36,631 8764,631 v1(8770,625)
OVCC_B45: "DB BOTTOM.14" VT6.14 | length 2382.1
  Top Layer w10: v1(6705,609.84) 6738.96,575.89 VT6.14@6786.81,575.89 ; v1(8839.83,594.17) 8850,584 8850,483.96
  Bottom Layer w10: v1(6705,609.84) 7183.01,609.84 7216.68,576.17 8404.36,576.17 8441.19,613 8701.17,613 8720,594.17 v1(8839.83,594.17)
OVCC_B46: "DB BOTTOM.15" VT6.13 | length 2349.8
  Top Layer w10: VT6.13@6786.81,601.48 6835.7,601.48 6860,577.17 v1(6860,558.17) ; v1(8780,563) 8780,585 8821,626 8862.74,626 8950,538.74 8950,483.96
  Bottom Layer w10: v1(6860,558.17) 8422.36,558.17 8458.19,594 8689,594 8720,563 v1(8780,563)
OVCC_B47: "DB BOTTOM.16" VT6.12 | length 3276.4
  Top Layer w10: VT6.12@6786.81,627.07 6839.93,627.07 6891,576 6891,326 v1(7004,213) ; v1(7735,213) 7740.18,207.82 8180,207.82 8205,232.82 8181,269 8119,269 8100,288 8100,609 8146,655 8867,655 8930,592 9001,592 9050,543 9050,483.96
  Bottom Layer w10: v1(7004,213) v1(7735,213)
OVCC_B48: "DB BOTTOM.25" VT13.20 | length 602
  Top Layer w10: 9050,791.04 9050,1150.84 9065.16,1166 VT13.20@9065.16,1386.81
OVCC_B49: "DB BOTTOM.26" VT13.18 | length 622.3
  Top Layer w10: 8950,791.04 8950,1058 9013.98,1121.98 VT13.18@9013.98,1386.81
OVCC_B50: "DB BOTTOM.27" VT13.17 | length 653.1
  Top Layer w10: 8850,791.04 8850,1111 8988.39,1249.39 VT13.17@8988.39,1386.81
OVCC_B51: "DB BOTTOM.28" VT13.16 | length 683.9
  Top Layer w10: 8750,791.04 8750,1049.61 8962.8,1262.41 VT13.16@8962.8,1386.81
OVCC_B52: "DB BOTTOM.29" VT13.15 | length 714.7
  Top Layer w10: 8650,791.04 8650,990.48 8937.2,1277.68 VT13.15@8937.2,1386.81
OVCC_B53: "DB BOTTOM.30" VT13.14 | length 745.6
  Top Layer w10: 8550,791.04 8550,855 8618,923 8618,994.48 8911.61,1288.09 VT13.14@8911.61,1386.81
OVCC_B54: "DB BOTTOM.31" VT13.13 | length 776.4
  Top Layer w10: 8450,791.04 8450,831 8547,928 8547,1007.54 8886.02,1346.57 VT13.13@8886.02,1386.81
OVCC_B55: "DB BOTTOM.32" VT13.12 | length 824.8
  Top Layer w10: 8350,791.04 8350,835 8380,835 8462,917 8462,948 8860.43,1346.43 VT13.12@8860.43,1386.81
OVCC_B56: "DB BOTTOM.33" VT14.20 | length 602
  Top Layer w10: 8250,791.04 8250,1081 8265.16,1096.16 VT14.20@8265.16,1386.81
OVCC_B57: "DB BOTTOM.34" VT14.18 | length 622.3
  Top Layer w10: 8150,791.04 8150,1142.71 8213.98,1206.69 VT14.18@8213.98,1386.81
OVCC_B58: "DB BOTTOM.35" VT14.17 | length 653.1
  Top Layer w10: 8050,791.04 8050,1100.2 8188.39,1238.59 VT14.17@8188.39,1386.81
OVCC_B59: "DB BOTTOM.36" VT14.16 | length 683.9
  Top Layer w10: 7950,791.04 7950,1036.2 8162.8,1249 VT14.16@8162.8,1386.81
OVCC_B60: "DB BOTTOM.37" VT14.15 | length 714.7
  Top Layer w10: 7850,791.04 7850,991.88 8137.2,1279.09 VT14.15@8137.2,1386.81
OVCC_B61: "DB BOTTOM.38" VT14.14 | length 781.4
  Top Layer w10: 7750,791.04 7750,1036.61 7947,1233.61 8008.12,1233.61 8111.61,1337.1 VT14.14@8111.61,1386.81
OVCC_B62: "DB BOTTOM.39" VT14.13 | length 832.6
  Top Layer w10: 7650,791.04 7650,1010.01 7979.99,1340 8076.02,1340 8086.02,1350 VT14.13@8086.02,1386.81
OVCC_B63: "DB BOTTOM.40" VT14.12 | length 1258.5
  Top Layer w10: 7550,791.04 7550,836 7594,880 7594,960 7565,989 7565,1133 7559,1139 7559,1456 7569,1466 7698.91,1466 7729.91,1435 8050.55,1435 8060.43,1425.12 VT14.12@8060.43,1386.81
OVCC_B64: "DB LEFT.1" VT8.20 | length 872.2
  Top Layer w10: VT8.20@6404.84,4213.19 6404.84,4191 6326.98,4113.14 6326.98,3799.62 6348,3778.6 6348,3726 6464,3610 6464,3450 6483.96,3450
OVCC_B65: "DB LEFT.2" VT8.18 | length 1034.9
  Top Layer w10: VT8.18@6456.02,4213.19 6456.02,4157.02 6344.98,4045.98 6344.98,3835.02 6366,3814 6366,3771 6501,3636 6501,3522.01 6538.33,3484.69 6538.33,3415 6519,3415 6504,3400 6504,3350 6483.96,3350
OVCC_B66: "DB LEFT.3" VT8.17 | length 1499.3
  Top Layer w10: v1(6308,4259) 6308,3775 6328,3755 6328,3320 6398,3250 6483.96,3250 ; VT8.17@6481.61,4213.19 6481.61,4276.61 v1(6525,4320)
  Bottom Layer w10: v1(6308,4259) 6464,4259 v1(6525,4320)
OVCC_B67: "DB LEFT.4" VT8.16 | length 1256.7
  Top Layer w10: 6483.96,3150 6539,3160 6539,3373.47 6557,3391.47 6557,3668.52 6362.98,3862.53 6362.98,4035.78 6507.2,4180 VT8.16@6507.2,4213.19
OVCC_B68: "DB LEFT.5" VT8.15 | length 1352.9
  Top Layer w10: 6483.96,3050 6504,3050 6643,3189 6643,3810.46 6660,3827.46 6660,4019 6681,4040 6681,4073.66 6649.66,4105 6590,4105 6532.8,4162.2 VT8.15@6532.8,4213.19
OVCC_B69: "DB LEFT.6" VT8.14 | length 2438.5
  Top Layer w10: 6483.96,2950 6540,2950 6568,2922 6568,2813 6541,2786 6430,2786 6428,2784 6428,2721 6444,2705 6641,2705 6680,2744 6680,3775.46 6697,3792.46 6697,3968.4 6739,4010.4 6739,4225.69 6699,4265.69 6578.46,4265.69 6558.39,4245.61 VT8.14@6558.39,4213.19
OVCC_B70: "DB LEFT.7" VT8.13 | length 1969.6
  Top Layer w10: v1(6277.75,4153.8) 6242.96,4119 6242.96,3449.04 6292,3400 6292,2905 6280,2893 6280,2867 6297,2850 6483.96,2850 ; VT8.13@6583.98,4213.19 6583.98,4164.46 v1(6612.82,4135.61)
  Bottom Layer w10: v1(6277.75,4153.8) 6594.64,4153.8 v1(6612.82,4135.61)
OVCC_B71: "DB LEFT.8" VT8.12 | length 1726.2
  Top Layer w10: 6483.96,2750 6628,2750 6661,2783 6661,3792.46 6679,3810.46 6679,3992 6720,4033 6720,4126 6680,4166 6620,4166 6609.57,4176.43 VT8.12@6609.57,4213.19
OVCC_B72: "DB LEFT.9" VT7.20 | length 1600.7
  Top Layer w10: VT7.20@6384.84,1213.19 6384.84,1234.16 6276,1343 6276,1617 6309,1650 6309,2025 6334,2050 6334,2325 6365,2356 6365,2586.87 6428.13,2650 6483.96,2650
OVCC_B73: "DB LEFT.10" VT7.18 | length 1525.9
  Top Layer w10: VT7.18@6436.02,1213.19 6436.02,1253 6427.43,1261.6 6383.29,1261.6 6294,1350.88 6294,1598.59 6339,1643.59 6339,1974.1 6352,1987.1 6352,2309.43 6394,2351.43 6394,2504 6440,2550 6483.96,2550
OVCC_B74: "DB LEFT.11" VT7.17 | length 1415.6
  Top Layer w10: VT7.17@6461.61,1213.19 6461.61,1259.69 6385.3,1336 6346.88,1336 6312,1370.88 6312,1581.03 6357.58,1626.61 6357.58,1956.69 6370,1969.1 6370,2291.43 6414.51,2335.94 6414.51,2420 6444.51,2450 6483.96,2450
OVCC_B75: "DB LEFT.12" VT7.16 | length 1318.9
  Top Layer w10: 6483.96,2350 6433,2343 6433,2302.84 6388,2257.84 6388,1951.1 6375.58,1938.69 6375.58,1608.61 6330,1563.03 6330,1383.95 6358.95,1355 6409.89,1355 6487.2,1277.69 VT7.16@6487.2,1213.19
OVCC_B76: "DB LEFT.13" VT7.15 | length 1218.1
  Top Layer w10: 6483.96,2250 6443,2250 6407,2214 6407,1941.47 6393.58,1928.05 6393.58,1562.58 6348,1517 6348,1405.95 6380,1373.95 6435.89,1373.95 6512.8,1297.04 VT7.15@6512.8,1213.19
OVCC_B77: "DB LEFT.14" VT7.14 | length 1104.5
  Top Layer w10: 6483.96,2150 6443,2150 6426,2133 6426,1917.1 6411.58,1902.69 6411.58,1544.58 6366,1499 6366,1435.88 6409.94,1391.95 6449.92,1391.95 6538.39,1303.48 VT7.14@6538.39,1213.19
OVCC_B78: "DB LEFT.15" VT7.13 | length 1155.1
  Top Layer w10: 6483.96,2050 6600,2050 6629,2021 v1(6629,1590) ; v1(6546,1139) 6563.98,1156.98 VT7.13@6563.98,1213.19
  Bottom Layer w10: v1(6546,1139) 6546,1507 v1(6629,1590)
OVCC_B79: "DB LEFT.16" VT7.12 | length 904.9
  Top Layer w10: 6483.96,1950 6452,1950 6452,1908 6429.58,1885.58 6429.58,1524.58 6384,1479 6384,1449 6423,1410 6462,1410 6589.57,1282.43 VT7.12@6589.57,1213.19
OVCC_B80: "DB LEFT.25" VT15.20 | length 523
  Top Layer w10: 6791.04,1950 6944.85,1950 7179.69,2184.84 VT15.20@7216.81,2184.84
OVCC_B81: "DB LEFT.26" VT15.18 | length 502.8
  Top Layer w10: 6791.04,2050 6850,2050 7020.22,2220.22 7144,2220.22 7159.81,2236.02 VT15.18@7216.81,2236.02
OVCC_B82: "DB LEFT.27" VT15.17 | length 472
  Top Layer w10: 6791.04,2150 6919.4,2150 7031.01,2261.61 VT15.17@7216.81,2261.61
OVCC_B83: "DB LEFT.28" VT15.16 | length 441.2
  Top Layer w10: 6791.04,2250 6939.18,2250 6976.39,2287.2 VT15.16@7216.81,2287.2
OVCC_B84: "DB LEFT.29" VT15.15 | length 441.2
  Top Layer w10: 6791.04,2350 6847,2350 6884.2,2312.8 VT15.15@7216.81,2312.8
OVCC_B85: "DB LEFT.30" VT15.14 | length 472
  Top Layer w10: 6791.04,2450 6875,2450 6986.61,2338.39 VT15.14@7216.81,2338.39
OVCC_B86: "DB LEFT.31" VT15.13 | length 502.8
  Top Layer w10: 6791.04,2550 6893,2550 7079.02,2363.98 VT15.13@7216.81,2363.98
OVCC_B87: "DB LEFT.32" VT15.12 | length 533.6
  Top Layer w10: 6791.04,2650 6845,2650 7105.43,2389.57 VT15.12@7216.81,2389.57
OVCC_B88: "DB LEFT.33" VT16.20 | length 693.8
  Top Layer w10: 6791.04,2750 6833,2750 6869,2714 7015,2714 7049.32,2748.32 7049.32,2935.96 7173.2,3059.84 VT16.20@7216.81,3059.84
OVCC_B89: "DB LEFT.34" VT16.18 | length 763.3
  Top Layer w10: 6791.04,2850 6811,2850 6811,2827 6832.71,2827 6904.71,2755 6992,2755 7008,2771 7008,2959.46 7028,2979.46 7028,3025.21 7040,3037.21 7085.75,3037.21 7159.57,3111.02 VT16.18@7216.81,3111.02
OVCC_B90: "DB LEFT.35" VT16.17 | length 516.5
  Top Layer w10: 6791.04,2950 6833,2950 6833,2972.87 6933.13,3073 7089.55,3073 7153.17,3136.61 VT16.17@7216.81,3136.61
OVCC_B91: "DB LEFT.36" VT16.16 | length 472.2
  Top Layer w10: 6791.04,3050 6854.48,3050 6924.73,3120.25 7066.68,3120.25 7108.63,3162.2 VT16.16@7216.81,3162.2
OVCC_B92: "DB LEFT.37" VT16.15 | length 441.4
  Top Layer w10: 6791.04,3150 7060.43,3150 7098.23,3187.8 VT16.15@7216.81,3187.8
OVCC_B93: "DB LEFT.38" VT16.14 | length 440.9
  Top Layer w10: 6791.04,3250 6972.64,3250 7009.25,3213.39 VT16.14@7216.81,3213.39
OVCC_B94: "DB LEFT.39" VT16.13 | length 471.8
  Top Layer w10: 6791.04,3350 6852,3350 6933,3269 7011,3269 7041.02,3238.98 VT16.13@7216.81,3238.98
OVCC_B95: "DB LEFT.40" VT16.12 | length 527.2
  Top Layer w10: 6791.04,3450 6836.09,3450 6923,3363.09 6923,3321 6935,3309 7031.5,3309 7075.93,3264.57 VT16.12@7216.81,3264.57
OVCC_B96: "DB RIGHT.1" VT4.20 | length 917.6
  Top Layer w10: 10516.04,1550 10560,1550 10599,1511 10599,1139.75 10637.52,1101.23 10637.52,937.48 10672,903 10672,867 10620.31,815.31 10577.66,815.31 VT4.20@10577.66,786.81
OVCC_B97: "DB RIGHT.2" VT4.18 | length 1042.4
  Top Layer w10: 10516.04,1650 10473,1650 10451,1628 10451,1245 10619.52,1076.48 10619.52,965.35 10613.82,959.66 10613.82,895.41 10596.2,877.79 10564.26,877.79 10526.48,840 VT4.18@10526.48,786.81
OVCC_B98: "DB RIGHT.3" VT4.17 | length 1165.6
  Top Layer w10: VT4.17@10500.89,786.81 10500.89,842.68 10561.48,903.27 10580,903.27 10595.82,919.1 10595.82,972.52 10601.52,978.21 10601.52,1060 10433,1228.52 10433,1745 10438,1750 10516.04,1750
OVCC_B99: "DB RIGHT.4" VT4.16 | length 1411.7
  Top Layer w10: VT4.16@10475.3,786.81 10475.3,840 10443.3,872 10308.27,872 10260.27,920 10260.27,1347 10340,1426.73 10340,1801 10389,1850 10516.04,1850
OVCC_B100: "DB RIGHT.5" VT4.15 | length 1543.4
  Top Layer w10: VT4.15@10449.7,786.81 10449.7,750 10459.7,740 10590,740 10690,840 10690,933 10655.52,967.48 10655.52,1413.48 10617,1452 10617,1915 10582,1950 10516.04,1950
OVCC_B101: "DB RIGHT.6" VT4.14 | length 2096.4
  Top Layer w10: VT4.14@10424.11,786.81 10424.11,738.2 10440.32,722 10604.22,722 10708,825.78 10708,951 10674,985 10674,1428.87 10635,1467.87 10635,2123 10571,2187 10461,2187 10461,2060 10471,2050 10516.04,2050
OVCC_B102: "DB RIGHT.7" VT4.13 | length 2571.5
  Top Layer w10: VT4.13@10398.52,786.81 10398.52,725.47 10420,704 10637,704 10726,793 10726,969 10712.92,982.08 10712.92,2103.08 10604,2212 10455,2212 10442,2199 10442,2041 10477,2006 10560,2006 10586,2032 10586,2124 10560,2150 10516.04,2150
OVCC_B103: "DB RIGHT.8" VT4.12 | length 2144
  Top Layer w10: VT4.12@10372.93,786.81 10372.93,695.06 10383,685 10673,685 10744,756 10744,987 10730.92,1000.08 10730.92,2136.08 10617,2250 10516.04,2250
OVCC_B104: "DB RIGHT.9" VT3.20 | length 1751.6
  Top Layer w10: 10516.04,2350 10600,2350 10626,2376 10626,3901.66 10577.66,3950 VT3.20@10577.66,3986.81
OVCC_B105: "DB RIGHT.10" VT3.18 | length 1641.1
  Top Layer w10: 10516.04,2450 10565,2450 10608,2493 10608,3663 10522,3749 10522,3904.93 10526.48,3909.41 VT3.18@10526.48,3986.81
OVCC_B106: "DB RIGHT.11" VT3.17 | length 1530.7
  Top Layer w10: VT3.17@10500.89,3986.81 10500.89,3735.11 10590,3646 10590,2579 10561,2550 10516.04,2550
OVCC_B107: "DB RIGHT.12" VT3.16 | length 2459.1
  Top Layer w10: VT3.16@10475.3,3986.81 10475.3,4020 10492.3,4037 10600,4037 10655,3982 10655,2359 10611,2315 10470,2315 10459,2326 10459,2639 10470,2650 10516.04,2650
OVCC_B108: "DB RIGHT.13" VT3.15 | length 2753.6
  Top Layer w10: VT3.15@10449.7,3986.81 10449.7,4024.7 10481,4056 10617,4056 10673,4000 10673,2319 10650,2296 10446,2296 10424,2318 10424,2722 10452,2750 10516.04,2750
OVCC_B109: "DB RIGHT.14" VT3.14 | length 1780.4
  Top Layer w10: v1(10424,3744) 10424,3809.89 10424.11,3810 VT3.14@10424.11,3986.81 ; v1(10437,2809) 10478,2850 10516.04,2850 ; v1(10704,2786) v1(10704,3414)
  Bottom Layer w10: v1(10424,3744) 10548,3620 10548,3416 10550,3414 v1(10704,3414) ; v1(10437,2809) 10438,2810 10472,2810 10496,2786 v1(10704,2786)
OVCC_B110: "DB RIGHT.15" VT3.13 | length 1256.3
  Top Layer w10: VT3.13@10398.52,3986.81 10398.52,3868 10393,3862.48 10393,3716 v1(10511,3598) ; v1(10423,3199) 10423,2960 10433,2950 10516.04,2950
  Bottom Layer w10: v1(10423,3199) 10369,3253 10369,3344 10511,3486 v1(10511,3598)
OVCC_B111: "DB RIGHT.16" VT3.12 | length 1114.2
  Top Layer w10: VT3.12@10372.93,3986.81 10372.93,3402.07 10461,3314 10540,3314 10571,3283 10571,3060 10561,3050 10516.04,3050
OVCC_B112: "DB RIGHT.25" VT11.20 | length 519.6
  Top Layer w10: VT11.20@9803.19,2775.16 9834.16,2775.16 10109,3050 10208.96,3050
OVCC_B113: "DB RIGHT.26" VT11.18 | length 499.4
  Top Layer w10: VT11.18@9803.19,2723.98 9840,2723.98 10066.02,2950 10208.96,2950
OVCC_B114: "DB RIGHT.27" VT11.17 | length 468.6
  Top Layer w10: VT11.17@9803.19,2698.39 9883.39,2698.39 10035,2850 10208.96,2850
OVCC_B115: "DB RIGHT.28" VT11.16 | length 437.7
  Top Layer w10: VT11.16@9803.19,2672.8 10049.8,2672.8 10127,2750 10208.96,2750
OVCC_B116: "DB RIGHT.29" VT11.15 | length 406.9
  Top Layer w10: VT11.15@9803.19,2647.2 10004,2647.2 10006.8,2650 10208.96,2650
OVCC_B117: "DB RIGHT.30" VT11.14 | length 435.4
  Top Layer w10: VT11.14@9803.19,2621.61 10049.39,2621.61 10121,2550 10208.96,2550
OVCC_B118: "DB RIGHT.31" VT11.13 | length 466.3
  Top Layer w10: VT11.13@9803.19,2596.02 9933.98,2596.02 10080,2450 10208.96,2450
OVCC_B119: "DB RIGHT.32" VT11.12 | length 497.1
  Top Layer w10: VT11.12@9803.19,2570.43 9926,2570.43 10146.43,2350 10208.96,2350
OVCC_B120: "DB RIGHT.33" VT12.20 | length 519.6
  Top Layer w10: VT12.20@9803.19,1975.16 9838.16,1975.16 10113,2250 10208.96,2250
OVCC_B121: "DB RIGHT.34" VT12.18 | length 499.4
  Top Layer w10: VT12.18@9803.19,1923.98 9922.98,1923.98 10149,2150 10208.96,2150
OVCC_B122: "DB RIGHT.35" VT12.17 | length 468.6
  Top Layer w10: VT12.17@9803.19,1898.39 9973.39,1898.39 10125,2050 10208.96,2050
OVCC_B123: "DB RIGHT.36" VT12.16 | length 437.7
  Top Layer w10: VT12.16@9803.19,1872.8 10023.88,1872.8 10101.08,1950 10208.96,1950
OVCC_B124: "DB RIGHT.37" VT12.15 | length 406.9
  Top Layer w10: VT12.15@9803.19,1847.2 10004,1847.2 10006.8,1850 10208.96,1850
OVCC_B125: "DB RIGHT.38" VT12.14 | length 435.4
  Top Layer w10: VT12.14@9803.19,1821.61 10044.39,1821.61 10116,1750 10208.96,1750
OVCC_B126: "DB RIGHT.39" VT12.13 | length 466.3
  Top Layer w10: VT12.13@9803.19,1796.02 9985.98,1796.02 10132,1650 10208.96,1650
OVCC_B127: "DB RIGHT.40" VT12.12 | length 497.1
  Top Layer w10: VT12.12@9803.19,1770.43 9921.57,1770.43 10142,1550 10208.96,1550
RDY0: AD5293.14@3386.81,3123.23 BBB_DOWN.15 | length 2523.9
  Top Layer w10: v1(3120,2965) 3140,2985 3273.18,2985 3356,3067.82 3356,3123.23 AD5293.14@3386.81,3123.23
  Bottom Layer w10: BBB_DOWN.15@995.83,2900 1013,2900 1013,2920 1138,2930 1154,2946 3101,2946 v1(3120,2965)
RDY1: AD5293.14@3613.19,1776.77 BBB_DOWN.23 | length 3249.8
  Top Layer w10: v1(3597,2345) 3597,1776.77 AD5293.14@3613.19,1776.77
  Bottom Layer w10: BBB_DOWN.23@995.83,2500 1070,2500 1120,2450 1401,2450 1430,2421 2756,2421 2812,2365 3577,2365 v1(3597,2345)
SCLK_W_U_Power_Control1: AD5293.11@3613.19,1700
SCLK_W_U_Power_Control2: AD5293.11@3386.81,3200 BBB_DOWN.22 | length 2350.9
  Top Layer w10: v1(2584,2590) 2584,2607.34 3060.66,3084 3223.38,3084 3339.38,3200 AD5293.11@3386.81,3200
  Bottom Layer w10: BBB_DOWN.22@1302.91,2600 2574,2600 v1(2584,2590)
SDO_W_U_Power_Control1: AD5293.13@3613.19,1751.18 BBB_DOWN.30 | length 4248.9
  Top Layer w10: AD5293.13@3613.19,1751.18 3659,1751.18 3660,1752.18 3660,2599 v1(3617,2642)
  Bottom Layer w10: BBB_DOWN.30@1302.91,2200 1255,2200 1255,2242 1040,2457 954,2457 941,2470 941,2530 951,2540 1132,2540 1234,2642 2566,2642 2582,2626 2626,2626 2642,2642 v1(3617,2642)
SDO_W_U_Power_Control2: AD5293.13@3386.81,3148.82 BBB_DOWN.18 | length 2430.3
  Top Layer w10: v1(3325,3081.82) 3325,3123.82 3350,3148.82 AD5293.13@3386.81,3148.82
  Bottom Layer w10: BBB_DOWN.18@1302.91,2800 2674,2800 2710,2764 3259,2764 3325,2830 v1(3325,3081.82)
SPI1_SCLK: BBB_DOWN.31
SPICS0: AD5293.12 BBB_DOWN.17 | length 6330.8
  Top Layer w10: v1(1172,2800) 1172,2457 1840,1789 1860,1789 1882,1811 1882,1889 1953,1960 2251,1960 ; v1(3071,2258) 2987,2258 ; AD5293.12@3386.81,3174.41 3339.25,3174.41 3228.84,3064 3078.66,3064 3040,3025.34 3040,2947 3340,2647 3340,2611 2987,2258 ; v1(3543,1744) 3561.41,1725.59 AD5293.12@3613.19,1725.59 ; 2251,1960 2689,1960 2987,2258 ; 2251,1960 2251,2258 2987,2258
  Bottom Layer w10: BBB_DOWN.17@995.83,2800 v1(1172,2800) ; v1(3071,2258) 3290,2258 3543,2005 v1(3543,1744)
SPICS1: BBB_DOWN.28
V_RST: AD5293.1 BBB_DOWN.12 | length 6059.3
  Top Layer w10: v1(3098,3033) 3089,3024 3089,2946 3134,2901 3504,2901 3566,2839 3566,2655 3543,2632 3543,1899.77 3420,1776.77 ; AD5293.1@3386.81,1776.77 3420,1776.77 ; AD5293.1@3613.19,3123.23 3635,3123.23 3748,3010.23 3748,2254 3858,2144 3858,1540 3838,1520 3548,1520 3473,1595 3473,1743.77 3440,1776.77 3420,1776.77
  Bottom Layer w10: BBB_DOWN.12@1302.91,3100 2287.46,3100 2379.46,3192 2790,3192 2800,3182 2800,3088 2827,3061 3070,3061 v1(3098,3033)
pads on no net: 3V3.H 5V.H 12V.H "DB LEFT.19" AD5293.5

## Silkscreen, mask and mechanical layers (free items; w line width, h text height)
Top Overlay:
  text "THIS SIDE FACING BBB ETHERNET PORT" at 1110,3760 h60
  text "0.1uF BANK" at 8281,2469 h60
  text "BeagleBone Black Board" at 4220,400 h100
  text "(NO POWER OR GROUND PLANES)" at 4182,298 h100
  text "Norman Gifford" at 4220,189 h100
  text "University of Utah" at 4220,89 h100
Bottom Overlay:
  text "0.1uF BANK" at 8849,2470 h60
Bottom Solder:
  region: 2849,1424 2849,1376 2936,1376 2936,1424
Mechanical 3:
  the board outline again, w10